# Altium PCB PCB_Menu_display_1.pcbdoc
Units mil, origin at the board's own origin, x right, y up, seen from the top; angles counter-clockwise.
Board outline 2750 x 3490 mil, 2 copper layers (Top Layer, Bottom Layer); 17 components, 10 nets, 75 pads, 2 vias.
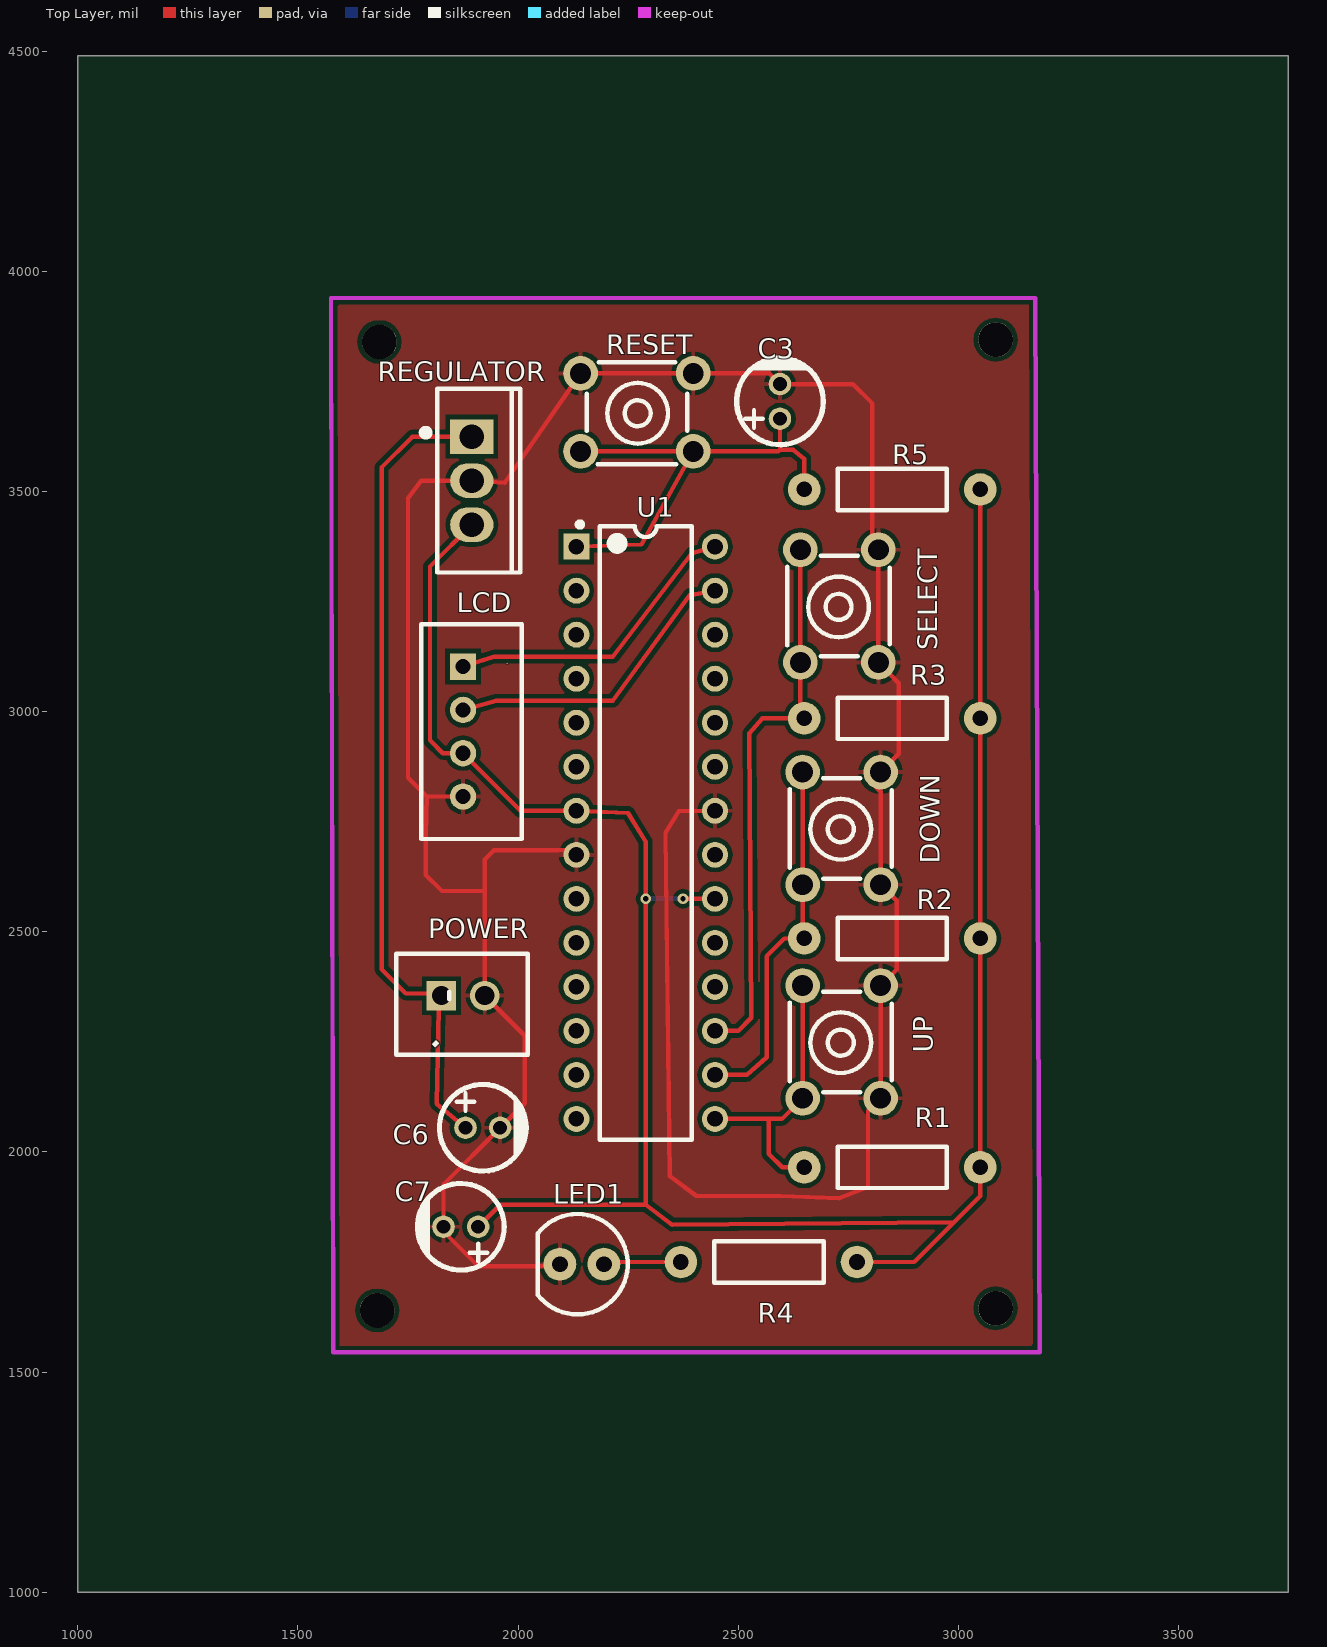
[diagram p0: Top Layer view]
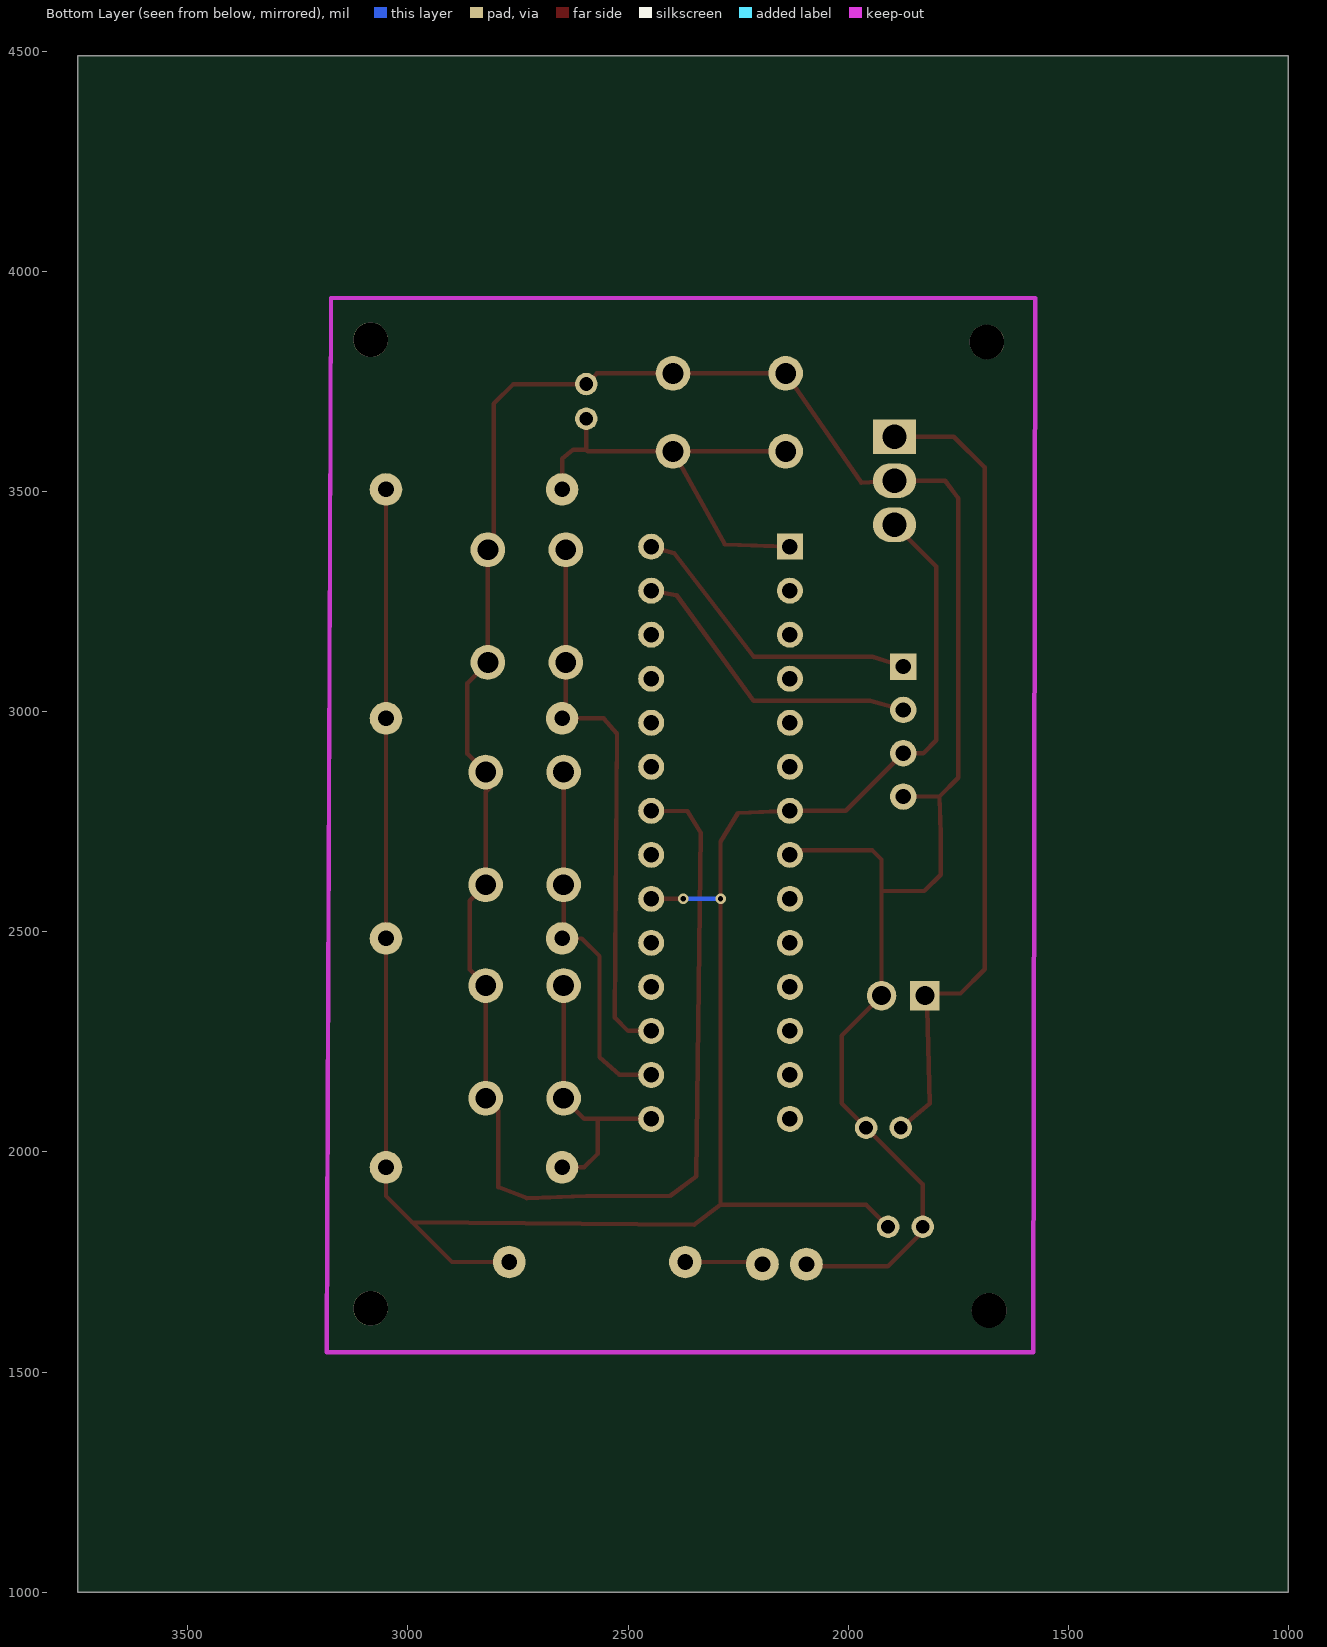
[diagram p1: Bottom Layer view, seen from below]

## Layer stack, top to bottom
Top Solder: solder mask 0.4, Solder Resist, Dk 3.5
Top Layer: signal copper 1.4
Dielectric1: dielectric 12.6, FR-4, Dk 4.8
Bottom Layer: signal copper 1.4
Bottom Solder: solder mask 0.4, Solder Resist, Dk 3.5

## Board outline
3750,1000 1000,1000 1000,4490 3750,4490

## Design rules (kind name [scope] priority, off if disabled: settings)
Clearance [All] p1: gap=10 ignorepadtopadclearanceinfootprint=FALSE except(0: Arc-Hole Track-Hole SMDPad-Hole THPad-Hole Via-Hole Fill-Hole Poly-Hole Region-Hole Text-Hole)
PolygonConnect [All] p1: connectstyle=Relief reliefconductorwidth=10 reliefentries=4 polygonreliefangle="90 Angle" airgapwidth=10
RoutingVias [All] p1: holewidth=28 width=50 viastyle="Through Hole" minholewidth=28 minwidth=50 maxholewidth=28 maxwidth=50
SolderMaskExpansion [All] p1: expansion=4 istentingtop=FALSE
Width [All] p1: maxlimit=10 minlimit=10 preferedwidth=10
30 further rules are at their usual default settings.

## Components (designator, comment, footprint, x,y, rotation, side; value= is the part's Value field where it differs from the comment)
C3 "100nF" CAP-TH_BD5.0-P2.00-D0.8-FD 2595,3705 r90 top
C6 "100nF" CAP-TH_BD5.0-P2.00-D0.8-FD 1920,2055 r0 top
C7 "100nF" CAP-TH_BD5.0-P2.00-D0.8-FD 1870,1830 r180 top
DOWN "Push_Button" KEY-TH_4P-L6.0-W6.0-P4.50 2735,2735 r90 top
LCD "JST_4 PIN" JST_XH_4_PIN_TOP_ENTRY 1875,2955 r0 top
LED1 "LED" "5MM LED" 2195,1745 r180 top
POWER "JST4" CONN-TH_XHB-2A 1875.05,2355 r180 top
R1 "RESISTOR" AXIAL-0.4 2850,1965 r0 top
R2 "RESISTOR" AXIAL-0.4 2850,2485 r0 top
R3 "RESISTOR" AXIAL-0.4 2850,2985 r0 top
R4 "330R" AXIAL-0.4 2570,1750 r180 top
R5 "10k" AXIAL-0.4 2850,3505 r0 top
REGULATOR "7805_Regulator" TO-220-3_L10.0-W4.5-P2.54-L 1895,3525 r270 top
RESET "RESET_BTN" KEY-TH_4P-L6.0-W6.0-P4.50 2270,3680 r180 top
SELECT "Push_Button" KEY-TH_4P-L6.0-W6.0-P4.50 2730,3240 r90 top
U1 "ATMEGA _328P-PU" DIP-28_L34.6-W7.3-P2.54-LS10.2-BL 2290,2725 r270 top
UP "Push_Button" KEY-TH_4P-L6.0-W6.0-P4.50 2735,2250 r90 top

## Footprints (in the part's own frame and the unit in brackets; to place one, negate y for a bottom-side part, rotate by r counter-clockwise, add the part's x,y. Pads: shape width x height; smd on the part's side, far side on the other; paste and mask are expansions set on the pad)
"5MM LED" [mm]
  round 1.9 hole 0.914: 1(0,0) 2(2.54,0)
  silkscreen extent -1.37,-2.9 3.81,2.9
AXIAL-0.4 [mil]
  round 74 hole 35.4: 1(-200,0) 2(200,0)
  silkscreen extent -124,-47 124,47
CAP-TH_BD5.0-P2.00-D0.8-FD [mm]
  round 1.3 hole 0.8: 1(-1,0) 2(1,0)
  silkscreen extent -2.5,-2.5 2.5,2.5
CONN-TH_XHB-2A [mm]
  rect 1.7x1.7 hole 1.1: 1(1.251,0)
  round 1.7 hole 1.1: 2(-1.251,0)
  silkscreen extent -3.75,-2.42 3.86,3.4
DIP-28_L34.6-W7.3-P2.54-LS10.2-BL [mm]
  rect 1.5x1.5 hole 0.9: 1(-16.51,-4)
  round 1.5 hole 0.9: 2(-13.97,-4) 3(-11.43,-4) 4(-8.89,-4) 5(-6.35,-4) 6(-3.81,-4) 7(-1.27,-4) 8(1.27,-4) 9(3.81,-4) 10(6.35,-4) 11(8.89,-4) 12(11.43,-4) 13(13.97,-4) 14(16.51,-4) 15(16.51,4) 16(13.97,4) 17(11.43,4) 18(8.89,4) 19(6.35,4) 20(3.81,4) 21(1.27,4) 22(-1.27,4) 23(-3.81,4) 24(-6.35,4) 25(-8.89,4) 26(-11.43,4) 27(-13.97,4) 28(-16.51,4)
  silkscreen extent -17.94,-3.95 17.7,2.65
JST_XH_4_PIN_TOP_ENTRY [mil]
  rect 60x60 hole 34.25: 1(0,147.6)
  round 60 hole 34.25: 2(0,49.21) 3(0,-49.21) 4(0,-147.64)
  silkscreen extent -94,-244 134,244
KEY-TH_4P-L6.0-W6.0-P4.50 [mm]
  round 2 hole 1.2: 1(-3.25,-2.25) 2(3.25,-2.25) 3(3.25,2.25) 4(-3.25,2.25)
  silkscreen extent -2.9,-2.9 2.9,3
TO-220-3_L10.0-W4.5-P2.54-L [mm]
  rect 2x2.5 hole 1.4: 1(-2.54,0)
  oval 2x2.5 hole 1.4: 2(0,0) 3(2.54,0)
  silkscreen extent -5.3,-2.86 5.3,2.8

## Free pads (board coordinates)
  round 78.74 hole 78.74: 1(1680,1640) 1(1685,3840) 1(3085,1645) 1(3085,3845)

## Via types
v1: diameter 24, hole 12, Top Layer to Bottom Layer, 2 vias

## Nets (pads, with @x,y where several pads share a name; then routed paths per layer and width w, separated by ;. In a path a pad name is that pad's centre, name@x,y a point inside that pad or via, vN(x,y) a via of type N, cw(c..) or ccw(c..) an arc to the next point about the centre after c; other vN are vias at no path point)
5V: C7.1 LCD.3 R1.2 R2.2 R3.2 R4.1 R5.2 REGULATOR.3 U1.7 U1.20 | length 5168
  Top Layer w10: REGULATOR.3 1800,3330 1800,2935 1829.21,2905.79 LCD.3 2005.79,2775 U1.7 2250,2770 2290,2705 2290,1880 ; C7.1 1959.37,1880 2290,1880 ; v1(2374.7,2575) U1.20 ; R4.1 2900,1750 2990,1840 ; R5.2 R3.2 R2.2 R1.2 3050,1900 2990,1840 ; 2290,1880 2350,1835 2990,1840
  Bottom Layer w10: v1(2290,2575) v1(2374.7,2575)
DOWNBTN: DOWN.3 DOWN.4 R2.1 U1.16 | length 879.9
  Top Layer w10: U1.16 2520,2175 2565,2215 2565,2445 2605,2485 R2.1 2646.42,2488.58 DOWN.4@2646.42,2607.05 ; DOWN.4@2631.42,2577.05 2646.42,2592.05 DOWN.3@2646.42,2862.95
GND: C3.2 C6.2 C7.2 DOWN.1 DOWN.2 LCD.4 LED1.2 POWER.2 REGULATOR.2 RESET.1 RESET.2 SELECT.1 SELECT.2 U1.8 U1.22 UP.1 UP.2 | length 7060.1
  Top Layer w10: LCD.4 1792.6,2807.4 ; POWER.2@1924.25,2355 2015,2264.25 2015,2110.63 C6.2 1830.63,1926.26 C7.2 1830.63,1819.37 1910,1740 2090,1740 LED1.2 ; POWER.2 1924.3,2664.3 1945,2685 2122.5,2685 U1.8 ; 1924.3,2592.8 1827.2,2592.8 1790,2630 1790,2722.4 1792.6,2807.4 ; RESET.2@2142.05,3768.58 2397.95,3768.58 2570.79,3768.58 C3.2 ; RESET.2@2142.1,3768.6 1970,3520 REGULATOR.2 1780,3525 1750,3485 1750,2850 1792.6,2807.4 ; U1.22 2365,2774 2335,2725 2345,1945 2405,1900 2595,1900 2730,1895 2795,1920 2795,1970 2795,2093.47 2823.58,2122.05 2823.58,2347.95 UP.2@2793.58,2377.95 ; C3.2 2760.6,3744.4 2805,3700 2805,3381.5 SELECT.2@2818.6,3367.9 ; DOWN.2@2808.58,2832.95 2823.58,2817.95 2823.58,2607.05 2860,2570.63 2860,2414.37 UP.2@2823.58,2377.95 ; SELECT.1@2818.58,3112.05 SELECT.2@2818.58,3367.95 ; SELECT.1@2818.6,3112.1 2865,3065 2865,2904.37 DOWN.2@2823.58,2862.95
R4_2: LED1.1 R4.2 | length 177.1
  Top Layer w10: LED1.1 2200,1750 R4.2
SCL: LCD.1 U1.28 | length 694.1
  Top Layer w10: LCD.1 1945,3125 2215,3125 2395,3360 U1.28
SDA: LCD.2 U1.27 | length 698.2
  Top Layer w10: LCD.2 1950,3025 2215,3025 2390,3265 U1.27
SELECTBTN: R3.1 SELECT.3 SELECT.4 U1.17 | length 1267.5
  Top Layer w10: U1.17 2500,2275 2530,2305 2525.3,2950.8 2555,2985 R3.1 2641.42,2993.58 2641.42,3112.05 SELECT.3@2641.42,3367.95
U1_1: C3.1 R5.1 RESET.3 RESET.4 U1.1 | length 1046.7
  Top Layer w10: U1.1 2280,3380 RESET.4@2397.95,3591.42 ; RESET.3@2142.05,3591.42 2197.95,3591.42 RESET.4@2397.95,3591.42 ; C3.1 2595,3595 ; R5.1 2650,3575 2625,3595 2595,3595 ; RESET.4@2397.95,3591.42 2591.42,3591.42 2595,3595
UPBTN: R1.1 U1.15 UP.3 UP.4 | length 659.4
  Top Layer w10: U1.15 2599.37,2075 UP.4@2646.42,2122.05 ; 2569.4,2075 2569.4,1995.6 2600,1965 R1.1 ; UP.4@2616.42,2122.05 2646.42,2152.05 UP.3@2646.42,2377.95
VCC: C6.1 POWER.1 REGULATOR.1 | length 1874.8
  Top Layer w10: POWER.1 1820,2349.25 1820,2325 1815,2110 C6.1 ; POWER.1@1835,2360 1745,2360 1690,2415 1690,3555 1760,3625 REGULATOR.1
pads on no net: U1.2 U1.3 U1.4 U1.5 U1.6 U1.9 U1.10 U1.11 U1.12 U1.13 U1.14 U1.18 U1.19 U1.21 U1.23 U1.24 U1.25 U1.26

## Polygon pours and split planes (outlines as drawn)
GND on Top Layer "Top Layer-GND" (solid, pour order 0): 1570,3945 1570,1540 3189.98,1540 3180,3945